# EAGLE board SmartPlantSensor (EAGLE 9.4.1)
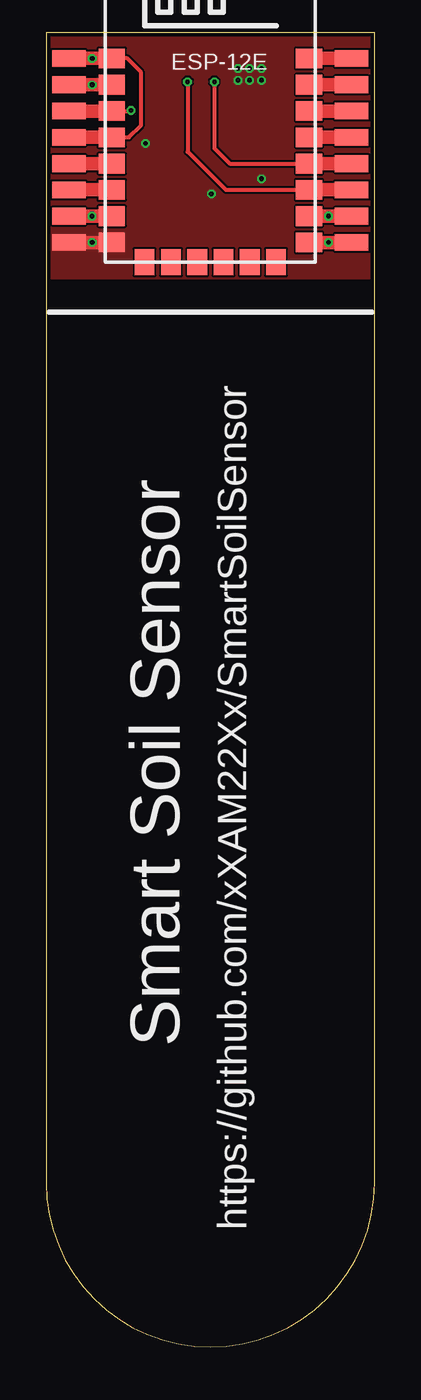
[diagram p0: board, top side]
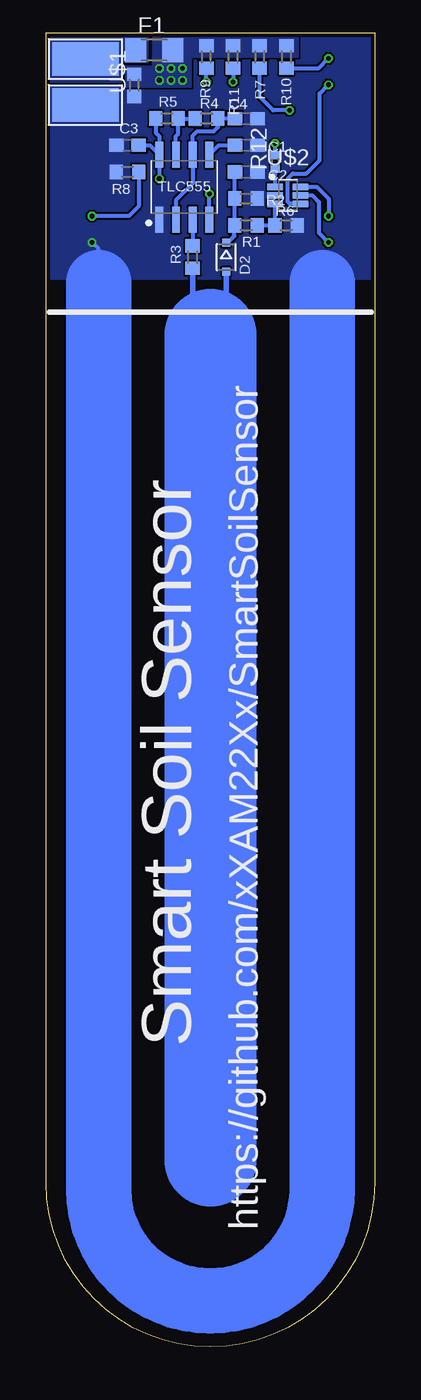
[diagram p1: board, bottom side, seen from below]

Size 25 x 100 mm. Coordinates in mm from the lower left corner, seen from the top.
Outline: 25,12.5 25,100 0,100 0,12.5 arc180 25,12.5
Copper layers (1*16): Top 0.035mm / dielectric 1.5mm / Bottom 0.035mm
Design rules "PCB-POOL Standard *": minimum track width 0.15mm, minimum drill 0.3mm, track to track 0.15mm, track to pad 0.15mm, pad to pad 0.15mm, via to via 0.15mm, smd to smd 0.15mm, copper to edge 0.3mm, drill to drill 0.2mm, minimum pad ring 0.2mm, minimum via ring 0.15mm, stop-mask expansion 0.075mm, vias tented up to drill 0mil, thermal gap 0.2mm

## Footprints (pad centres in the part's own frame; a part is rotated, then mirrored left to right if it is on the bottom)
C0603 = smd 1.1 x 1: 1 -0.85,0; 2 0.85,0
SOD323-R = smd 0.6 x 0.6: A 1.1,0; C -1.1,0
ESP-12E = smd 2 x 1.5: 1 -7.5,6.61; 2 -7.5,4.61; 3 -7.5,2.61; 4 -7.5,0.61; 5 -7.5,-1.39; 6 -7.5,-3.39; 7 -7.5,-5.39; 8 -7.5,-7.39; 15 7.5,-7.39; 16 7.5,-5.39; 17 7.5,-3.39; 18 7.5,-1.39; 19 7.5,0.61; 20 7.5,2.61; 21 7.5,4.61; 22 7.5,6.61 | smd 1.5 x 2: 9 -5,-8.89; 10 -3,-8.89; 11 -1,-8.89; 12 1,-8.89; 13 3,-8.89; 14 5,-8.89
R1206 = smd 1.6 x 1.803: 1 -1.422,0; 2 1.422,0
5-2,5 = smd 2.54 x 5.08: 1 0,0
SMD1,27-2,54 = smd 1.27 x 2.54: 1 0,0
R0603 = smd 1 x 1.1: 1 -0.85,0; 2 0.85,0
R0402 = smd 0.6 x 0.7: 1 -0.5,0; 2 0.5,0
SOIC8 = smd 1.968 x 0.599: 1 -2.473,1.905; 2 -2.473,0.635; 3 -2.473,-0.635; 4 -2.473,-1.905; 5 2.473,-1.905; 6 2.473,-0.635; 7 2.473,0.635; 8 2.473,1.905
SOT65P210X110-6 = smd 1.186 x 0.484: 1 -0.962,0.65; 2 -0.962,0; 3 -0.962,-0.65; 4 0.962,-0.65; 5 0.962,0; 6 0.962,0.65

## Placement (x,y rotation side)
C1  10nF  [C0603]  9.78,91.45 180 bottom
C2  1uF  [C0603]  9.78,89.42 0 bottom
C3  100nF  [C0603]  18.8,91.44 0 bottom
C4  470pF  [C0603]  9.78,93.48 180 bottom
D2  1N4148WS  [SOD323-R]  11.3,82.93 270 bottom
ESP-12E  ESP-12E  [ESP-12E]  12.5,91.44 0 top
F1  FUSE  [R1206]  16.76,98.68 0 bottom
PAD1  WIREPADSMD5-2,5  [5-2,5]  22,98 270 bottom
PAD3  WIREPADSMD5-2,5  [5-2,5]  22,94.5 90 bottom
PAD5  [SMD1,27-2,54]  1.75,98.05 90 top
PAD6  [SMD1,27-2,54]  1.75,96.05 90 top
PAD7  [SMD1,27-2,54]  1.75,94.05 90 top
PAD8  [SMD1,27-2,54]  1.75,92.05 90 top
PAD9  [SMD1,27-2,54]  1.75,90.05 90 top
PAD10  [SMD1,27-2,54]  1.75,88.05 90 top
PAD11  [SMD1,27-2,54]  1.75,86.05 90 top
PAD12  [SMD1,27-2,54]  1.75,84.05 90 top
PAD13  [SMD1,27-2,54]  23.25,98.05 90 top
PAD14  [SMD1,27-2,54]  23.25,96.05 90 top
PAD15  [SMD1,27-2,54]  23.25,94.05 90 top
PAD16  [SMD1,27-2,54]  23.25,92.05 90 top
PAD17  [SMD1,27-2,54]  23.25,90.05 90 top
PAD18  [SMD1,27-2,54]  23.25,88.05 90 top
PAD19  [SMD1,27-2,54]  23.25,86.05 90 top
PAD20  [SMD1,27-2,54]  23.25,84.05 90 top
R1  220k  [R0603]  9.78,85.35 180 bottom
R2  1M  [R0603]  9.78,87.38 180 bottom
R3  10k  [R0603]  13.84,82.93 270 bottom
R4  1k6  [R0603]  12.79,93.48 0 bottom
R5  330  [R0603]  15.8,93.47 0 bottom
R6  100k  [R0603]  6.73,85.35 180 bottom
R7  10k  [R0603]  8.74,98.17 90 bottom
R8  10k  [R0603]  18.8,89.42 0 bottom
R9  10k  [R0603]  12.81,98.17 90 bottom
R10  10k  [R0603]  6.71,98.17 90 bottom
R11  10k  [R0603]  10.78,98.17 90 bottom
R12  0  [R0402]  7.57,90.18 90 bottom
TLC555  TLC555CD  [SOIC8]  14.48,88.27 90 bottom
U$1  TVS_BI_DIODE  [R0603]  18.29,96.01 90 bottom
U$2  PI5A3157  [SOT65P210X110-6]  6.6,87.64 0 bottom

## Library data of the parts
C1-C4 = rcl; SPICEPREFIX: C
D2 = diode
ESP-12E = ESP
F1 R1-R12 = rcl; SPICEPREFIX: R
PAD1 PAD3 PAD5-PAD20 = wirepad
TLC555 = TexasInstruments
U$1 U$2 = HeRo

## Nets
+3V3: C3.2 ESP-12E.8 F1.2 PAD12.1 R5.1 R7.2 R9.2 R10.2 R11.2 R12.2 TLC555.4 TLC555.8 U$1.2 U$2.5
ADC: ESP-12E.2 PAD6.1 U$2.4
DISCH: R4.1 R5.2 TLC555.7
EN: ESP-12E.3 PAD7.1 R7.1
GND: C1.1 C2.2 C3.1 C4.1 ESP-12E.15 PAD3.1 PAD20.1 R2.1 R6.1 R8.1 TLC555.1 U$1.1 U$2.2
IO0: ESP-12E.18 PAD17.1 R9.1
IO2: ESP-12E.17 PAD18.1 R11.1
IO4: ESP-12E.19 PAD16.1
IO5: ESP-12E.20 PAD15.1
IO12: ESP-12E.6 PAD10.1
IO13: ESP-12E.7 PAD11.1 U$2.6
IO14: ESP-12E.5 PAD9.1
IO15: ESP-12E.16 PAD19.1 R8.2
N$1: C1.2 TLC555.5
N$4: R12.1 U$2.1
OUT: R3.1 TLC555.3
RST: ESP-12E.1 ESP-12E.4 PAD5.1 PAD8.1 R10.1
RXD: ESP-12E.21 PAD14.1
SADC: R1.1 R6.2 U$2.3
SENSOR: D2.A R3.2
SENSOR_OUT: C2.1 D2.C R1.2 R2.2
T: C4.2 R4.2 TLC555.2 TLC555.6
TXD: ESP-12E.22 PAD13.1
VCC: F1.1 PAD1.1

## Tracks (layer width: path | path; a pad name or v marks a point on that pad's centre or on a via)
+3V3  (via drill 0.35)
  Top 1.016: PAD12.1 v3.52,84.05 ESP-12E.8
  Bottom 0.305: TLC555.4 v12.57,87.76 | TLC555.8 v16.38,88.9 | U$2.5 4.76,87.64 4.25,87.13 4.25,84.78 v3.52,84.05 | R12.2 v7.57,91.57 | R5.1 16.65,92.4 16.38,92.13 TLC555.8 | C3.2 17.09,91.44 TLC555.8
  other vias: 14.61,97.28 15.49,97.28 16.38,97.28 14.61,96.39 15.49,96.39 16.38,96.39
  pour Top (rank 6, no thermals): 0,100 25,100 25,81.28 0,81.28
  pour Bottom (no thermals): 5.82,100 16.89,100 16.89,97.41 18.92,97.41 18.92,95.89 13.97,95.89 13.97,98.17 5.82,98.17
ADC  (via drill 0.35)
  Top 1.016: PAD6.1 v3.52,96.05 ESP-12E.2
  Bottom 0.305: U$2.4 6.46,86.99 6.6,87.13 6.6,88.91 6.22,89.29 5.21,89.29 4.19,90.3 4.19,95.38 v3.52,96.05
DISCH
  Bottom 0.305: TLC555.7 15.11,92.14 14.95,92.3 R5.2 R4.1
EN  (via drill 0.35)
  Top 0.305: ESP-12E.3 6.42,94.05 v6.48,94.11
  Top 1.016: PAD7.1 ESP-12E.3
  Bottom 0.305: v6.48,94.11 7.73,94.11 8.74,95.12 R7.1
GND  (via drill 0.35)
  Top 1.016: PAD20.1 v21.49,84.05 ESP-12E.15
  Bottom 0.305: 21,82.72 21,83.56 v21.49,84.05
  Bottom 0.406: 21,81 21,82.72
  Bottom 5: 4,81 4,12 arc180 21,12 21,81
  pour Bottom (rank 6, no thermals): 0,100 25,100 25,81.28 0,81.28
IO0  (via drill 0.35)
  Top 0.305: ESP-12E.18 13.96,90.05 12.81,91.21 v12.81,96.27
  Top 1.016: PAD17.1 ESP-12E.18
  Bottom 0.305: v12.81,96.27 R9.1
IO2  (via drill 0.35)
  Top 0.305: ESP-12E.17 13.68,88.05 10.78,90.95 v10.78,96.27
  Top 1.016: PAD18.1 ESP-12E.17
  Bottom 0.305: R11.1 v10.78,96.27
IO4
  Top 1.016: PAD16.1 ESP-12E.19
IO5
  Top 1.016: PAD15.1 ESP-12E.20
IO12
  Top 1.016: PAD10.1 ESP-12E.6
IO13  (via drill 0.35)
  Top 1.016: PAD11.1 v3.5,86.05 ESP-12E.7
  Bottom 0.305: U$2.6 4.41,88.29 3.5,87.38 v3.5,86.05
IO14
  Top 1.016: PAD9.1 ESP-12E.5
IO15  (via drill 0.35)
  Top 1.016: PAD19.1 v21.5,86.05 ESP-12E.16
  Bottom 0.305: R8.2 17.95,86.8 18.7,86.05 v21.5,86.05
N$1
  Bottom 0.305: TLC555.5 11.86,91.45 C1.2
N$4
  Bottom 0.305: U$2.1 R12.1
OUT
  Bottom 0.305: TLC555.3 R3.1
RST  (via drill 0.35)
  Top 0.305: ESP-12E.4 6.3,92.05 7.23,92.98 7.23,97 6.18,98.05 ESP-12E.1
  Top 1.016: PAD5.1 v3.52,98.05 ESP-12E.1 | PAD8.1 ESP-12E.4
  Bottom 0.305: R10.1 4.25,97.32 v3.52,98.05
RXD
  Top 1.016: PAD14.1 ESP-12E.21
SADC
  Bottom 0.305: R1.1 R6.2 7.57,85.37 U$2.3
SENSOR
  Bottom 0.406: D2.A 11.3,78.2 12.5,77 13.84,78.34 R3.2
  Bottom 7: 12.5,77 12.5,14.2
SENSOR_OUT
  Bottom 0.305: C2.1 R2.2 R1.2 10.67,85.31 10.67,84.55 11.18,84.03 D2.C
T
  Bottom 0.305: TLC555.2 15.11,87.25 13.84,88.52 TLC555.6 13.84,92.16 13.5,92.5 12.25,92.5 11.94,92.81 R4.2 C4.2
TXD
  Top 1.016: PAD13.1 ESP-12E.22
VCC
  pour Bottom (no thermals): 17.27,100 25,100 25,96.27 19.3,96.27 19.3,97.79 17.27,97.79

## Text on the board
tPlace: Smart Soil Sensor | https://github.com/xXAM22Xx/SmartSoilSensor
bPlace: Smart Soil Sensor | https://github.com/xXAM22Xx/SmartSoilSensor